# EAGLE board IoT_Motor_Driver_Standoff (EAGLE 9.6.2)

Size 32.05 x 26.18 mm. Coordinates in mm from the lower left corner, seen from the top.
Outline: 1.93,23.62 arc237 30.12,23.62 arc182 21.99,19.43 arc-235 9.8,19.05 arc182 1.93,23.62
Copper layers (1*16): Top 0.035mm / dielectric 0.15mm / Bottom 0.035mm
Design rules "default": minimum track width 6mil, minimum drill 0.35mm, track to track 6mil, track to pad 6mil, pad to pad 6mil, via to via 6mil, smd to smd 6mil, copper to edge 40mil, drill to drill 6mil, minimum pad ring 10mil, minimum via ring 8mil, stop-mask expansion 4mil, vias tented up to drill 0mil, thermal gap 10mil

## Footprints (pad centres in the part's own frame; a part is rotated, then mirrored left to right if it is on the bottom)
OT-EM3215 = hole 1.778: -8.877,5.125; 0,-10.25; 8.877,5.125

## Placement (x,y rotation side)
E$1  [OT-EM3215]  16.02,16 0 top
E$2  [ORDERING_INSTRUCTIONS]  45.23,41.4 0 top  (outside the outline)

## Library data of the parts
E$1 = OT-EM3215
E$2 = SparkFun-Aesthetics

## Text on the board
Top: Top Layer
Bottom: V10 | Bottom Layer
tDocu: 1.2mm Thickness / 2-Layer / 1oz copper outer / 0.5oz copper inner / Lead Free HASL